# Altium PCB OSI_A15.PcbDoc (part 2 of 2)
Units mil, origin at the board's own origin, x right, y up, seen from the top; angles counter-clockwise.
Board outline 5750 x 3400 mil, 2 copper layers (Top Layer, Bottom Layer); 1 components, 123 nets, 352 pads, 0 vias.
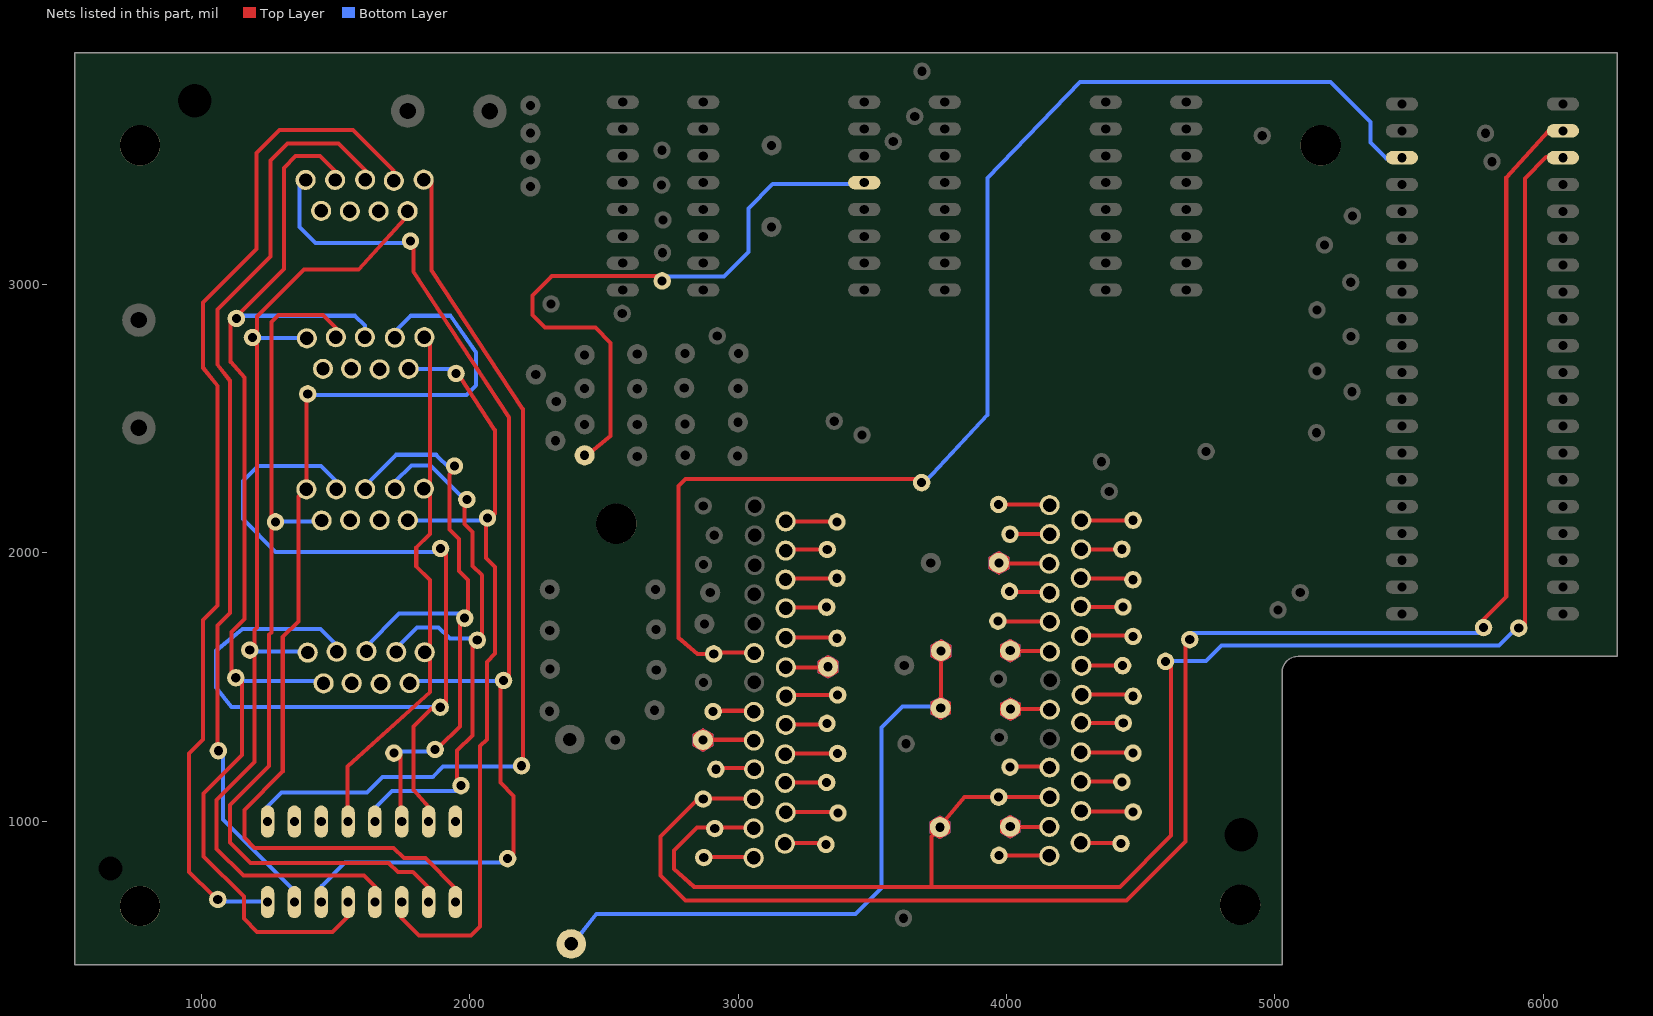
[diagram p2: the nets of this part, all layers, seen from the top]

## Nets (pads, with @x,y where several pads share a name; then routed paths per layer and width w, separated by ;. In a path a pad name is that pad's centre, name@x,y a point inside that pad or via, vN(x,y) a via of type N, cw(c..) or ccw(c..) an arc to the next point about the centre after c; other vN are vias at no path point) (continued)
$Net59: pad.1@2909,1623 pad.1@3060,1626 pad.1@3684,2261 pad.1@5473.5,3472 | length 4891.2
  Top Layer w15: pad.1@3060,1626 3039.5,1627.5 2919,1627.5 pad.1@2909,1623 2888.5,1622 2848.5,1622 2778,1683 2778,2249 2804,2275 3673,2275 pad.1@3684,2261
  Bottom Layer w15: pad.1@3684,2261 3698,2265 3929,2514 3929,3396 4274,3754 5207,3754 5356,3605 5356,3528 5414,3470 5465,3470 pad.1@5473.5,3472
$Net60: pad.1@2907,1408 pad.1@3059,1407 | length 152.5
  Top Layer w15: pad.1@2907,1408 2927.5,1411 3032,1411 pad.1@3059,1407
$Net61: pad.1@2869,1302 pad.1@3058.5,1300 | length 1091.5
  Top Layer w8: pad.1@2886.33,1331.98 2903.6,1322 2903.88,1303 2903.89,1302.52 pad.1@2903.9,1301.9 ; pad.1@2834,1301.9 pad.1@2869,1302 ; pad.1@2834,1301.9 2834,1322.1 pad.1@2851.4,1332.2 ; pad.1@2834,1301.9 2834,1301.83 2834.1,1281.6 pad.1@2851.5,1271.6 ; pad.1@2851.4,1332.2 pad.1@2869,1302 ; pad.1@2851.4,1332.2 2852,1332.53 2869,1342 2886.3,1332 pad.1@2869,1302 ; pad.1@2851.5,1271.6 2868.8,1261.6 2886.34,1271.61 pad.1@2886.5,1271.7 ; pad.1@2851.5,1271.6 pad.1@2869,1302 ; pad.1@2869,1302 pad.1@2903.9,1301.9 ; pad.1@2869,1302 pad.1@2886.5,1271.7 ; pad.1@2886.5,1271.7 2886.77,1271.86 2903.8,1281.9 2903.9,1301.83 pad.1@2903.9,1301.9
  Top Layer w15: pad.1@2869,1302 2893.5,1303 2903.88,1303 3028,1303 pad.1@3058.5,1300
  Bottom Layer w8: pad.1@2886.33,1331.98 2903.6,1322 2903.89,1302.52 pad.1@2903.9,1301.9 ; pad.1@2834,1301.9 pad.1@2869,1302 ; pad.1@2834,1301.9 2834,1301.83 2834.1,1281.6 pad.1@2851.5,1271.6 ; pad.1@2834,1301.9 2834,1322.1 pad.1@2851.4,1332.2 ; pad.1@2851.4,1332.2 pad.1@2869,1302 ; pad.1@2851.4,1332.2 2852,1332.53 2869,1342 2886.3,1332 pad.1@2869,1302 ; pad.1@2851.5,1271.6 2868.8,1261.6 2886.34,1271.61 pad.1@2886.5,1271.7 ; pad.1@2851.5,1271.6 pad.1@2869,1302 ; pad.1@2869,1302 pad.1@2903.9,1301.9 ; pad.1@2869,1302 pad.1@2886.5,1271.7 ; pad.1@2886.5,1271.7 2886.77,1271.86 2903.8,1281.9 2903.9,1301.83 pad.1@2903.9,1301.9
$Net62: pad.1@2917,1193 pad.1@3059.5,1193 | length 143.5
  Top Layer w15: pad.1@2917,1193 2942,1198 3032.5,1198 pad.1@3059.5,1193
$Net63: pad.1@2870,1082 pad.1@3057.5,1082 pad.1@4683,1676 pad.1@5778,1721 pad.1@6073.5,3572 | length 6532.8
  Top Layer w15: pad.1@3057.5,1082 3029,1084 2891.5,1084 pad.1@2870,1082 2852.5,1084.5 2710.5,942.5 2710.5,797.5 2804.5,703.5 4446.5,703.5 4667.5,924.5 4667.5,1661 pad.1@4683,1676 ; pad.1@5778,1721 5777.5,1736.5 5777.5,1751.5 5862.5,1836.5 5862.5,3397.5 6020.5,3571 pad.1@6073.5,3572
  Bottom Layer w15: pad.1@4683,1676 4680,1700 5770,1700 pad.1@5778,1721
$Net64: pad.1@2913,972 pad.1@3057.5,973 pad.1@3752,977 pad.1@3971,1089 pad.1@4161,1089 pad.1@4593,1595 pad.1@5909,1719 pad.1@6073.5,3472 | length 7848.9
  Top Layer w8: pad.1@3769.33,1006.98 3772.86,1004.94 3786.6,997 3786.89,977.52 pad.1@3786.9,976.9 ; pad.1@3717,976.9 3717,976.83 3717.1,956.6 3727.67,950.53 pad.1@3734.5,946.6 ; pad.1@3717,976.9 3749.65,976.99 pad.1@3752,977 ; pad.1@3717,976.9 3717,997.1 pad.1@3734.4,1007.2 ; pad.1@3734.4,1007.2 3751.03,978.66 pad.1@3752,977 ; pad.1@3734.4,1007.2 3735,1007.53 3752,1017 3769.3,1007 3757.33,986.25 pad.1@3752,977 ; pad.1@3734.5,946.6 3751.8,936.6 3769.34,946.61 pad.1@3769.5,946.7 ; pad.1@3734.5,946.6 pad.1@3752,977 ; pad.1@3752,977 pad.1@3786.9,976.9 ; pad.1@3752,977 pad.1@3769.5,946.7 ; pad.1@3769.5,946.7 3769.77,946.86 3786.8,956.9 3786.9,976.83 pad.1@3786.9,976.9
  Top Layer w15: pad.1@3057.5,973 3049,975.5 2847.5,975.5 2761.5,889.5 2761.5,822 2836,755 3721,755 ; pad.1@4161,1089 4135.5,1090 3843.5,1090 3772.86,1004.94 3757.33,986.25 3751.03,978.66 3750.61,978.15 3749.65,976.99 3727.67,950.53 3721,942.5 3721,755 ; pad.1@4593,1595 4613.5,1588 4613.5,946 4422.5,755 3721,755 ; pad.1@5909,1719 5931.5,1730.5 5931.5,3395 6011.5,3475 6040.5,3475 pad.1@6073.5,3472
  Bottom Layer w8: pad.1@3769.33,1006.98 3786.6,997 3786.89,977.52 pad.1@3786.9,976.9 ; pad.1@3717,976.9 pad.1@3752,977 ; pad.1@3717,976.9 3717,976.83 3717.1,956.6 pad.1@3734.5,946.6 ; pad.1@3717,976.9 3717,997.1 pad.1@3734.4,1007.2 ; pad.1@3734.4,1007.2 pad.1@3752,977 ; pad.1@3734.4,1007.2 3735,1007.53 3752,1017 3769.3,1007 pad.1@3752,977 ; pad.1@3734.5,946.6 3751.8,936.6 3769.34,946.61 pad.1@3769.5,946.7 ; pad.1@3734.5,946.6 pad.1@3752,977 ; pad.1@3752,977 pad.1@3786.9,976.9 ; pad.1@3752,977 pad.1@3769.5,946.7 ; pad.1@3769.5,946.7 3769.77,946.86 3786.8,956.9 3786.9,976.83 pad.1@3786.9,976.9
  Bottom Layer w15: pad.1@4593,1595 4603,1596 4743,1596 4801,1654 5836,1654 5890,1708 pad.1@5909,1719
$Net65: pad.1@2872,864 pad.1@3058,863 | length 186.2
  Top Layer w15: pad.1@2872,864 2889.5,865.5 3031,865.5 pad.1@3058,863
$Net66: pad.1@3174,915.5 pad.1@3327,913 | length 153.7
  Top Layer w15: pad.1@3174,915.5 3195,917.5 3310.5,917.5 pad.1@3327,913
$Net67: pad.1@3177,1032.5 pad.1@3372,1030 | length 195.5
  Top Layer w15: pad.1@3177,1032.5 3199.5,1034.5 3350,1034.5 pad.1@3372,1030
$Net68: pad.1@3175,1142 pad.1@3330,1144 | length 155.1
  Top Layer w15: pad.1@3175,1142 3198,1144.5 3314.5,1144.5 pad.1@3330,1144
$Net69: pad.1@3175,1249 pad.1@3371,1252 | length 196.3
  Top Layer w15: pad.1@3175,1249 3193.5,1252.5 3352.5,1252.5 pad.1@3371,1252
$Net70: pad.1@3177.5,1358.5 pad.1@3331,1364 | length 154
  Top Layer w15: pad.1@3177.5,1358.5 3199.5,1360 3315,1360 pad.1@3331,1364
$Net71: pad.1@3178.5,1464.5 pad.1@3371,1470 | length 193.7
  Top Layer w15: pad.1@3178.5,1464.5 3190.5,1470 pad.1@3371,1470
$Net72: pad.1@3178,1573 pad.1@3335,1575 | length 1059
  Top Layer w8: pad.1@3352.33,1604.98 3369.6,1595 3369.89,1575.52 pad.1@3369.9,1574.9 ; pad.1@3300,1574.9 pad.1@3335,1575 ; pad.1@3300,1574.9 3300,1574.83 3300.01,1573 3300.1,1554.6 pad.1@3317.5,1544.6 ; pad.1@3300,1574.9 3300,1595.1 pad.1@3317.4,1605.2 ; pad.1@3317.4,1605.2 pad.1@3335,1575 ; pad.1@3317.4,1605.2 3318,1605.53 3335,1615 3352.3,1605 pad.1@3335,1575 ; pad.1@3317.5,1544.6 3334.8,1534.6 3352.34,1544.61 pad.1@3352.5,1544.7 ; pad.1@3317.5,1544.6 pad.1@3335,1575 ; pad.1@3335,1575 pad.1@3369.9,1574.9 ; pad.1@3335,1575 pad.1@3352.5,1544.7 ; pad.1@3352.5,1544.7 3352.77,1544.86 3369.8,1554.9 3369.9,1574.83 pad.1@3369.9,1574.9
  Top Layer w15: pad.1@3178,1573 3300.01,1573 3322.5,1573 pad.1@3335,1575
  Bottom Layer w8: pad.1@3352.33,1604.98 3369.6,1595 3369.89,1575.52 pad.1@3369.9,1574.9 ; pad.1@3300,1574.9 pad.1@3335,1575 ; pad.1@3300,1574.9 3300,1574.83 3300.1,1554.6 pad.1@3317.5,1544.6 ; pad.1@3300,1574.9 3300,1595.1 pad.1@3317.4,1605.2 ; pad.1@3317.4,1605.2 pad.1@3335,1575 ; pad.1@3317.4,1605.2 3318,1605.53 3335,1615 3352.3,1605 pad.1@3335,1575 ; pad.1@3317.5,1544.6 3334.8,1534.6 3352.34,1544.61 pad.1@3352.5,1544.7 ; pad.1@3317.5,1544.6 pad.1@3335,1575 ; pad.1@3335,1575 pad.1@3369.9,1574.9 ; pad.1@3335,1575 pad.1@3352.5,1544.7 ; pad.1@3352.5,1544.7 3352.77,1544.86 3369.8,1554.9 3369.9,1574.83 pad.1@3369.9,1574.9
$Net73: pad.1@3177,1682.5 pad.1@3369,1681 | length 192.3
  Top Layer w15: pad.1@3177,1682.5 3187.5,1684 3349,1684 pad.1@3369,1681
$Net74: pad.1@3177,1793 pad.1@3330,1797 | length 153.2
  Top Layer w15: pad.1@3177,1793 3203,1796 3313.5,1796 pad.1@3330,1797
$Net75: pad.1@3176.5,1900 pad.1@3368,1905 | length 191.8
  Top Layer w15: pad.1@3176.5,1900 3203.5,1903 3349,1903 pad.1@3368,1905
$Net76: pad.1@3177,2008 pad.1@3332,2012 | length 155.3
  Top Layer w15: pad.1@3177,2008 3200,2012 pad.1@3332,2012
$Net77: pad.1@3177,2116.5 pad.1@3368,2115 | length 191.1
  Top Layer w15: pad.1@3177,2116.5 3204,2117 3346.5,2117 pad.1@3368,2115
$Net79: pad.1@3972,1962 pad.1@4160,1959 | length 1089.9
  Top Layer w8: pad.1@3989.33,1991.98 4006.6,1982 4006.89,1962.52 pad.1@4006.9,1961.9 ; pad.1@3937,1961.9 pad.1@3972,1962 ; pad.1@3937,1961.9 3937,1982.1 pad.1@3954.4,1992.2 ; pad.1@3937,1961.9 3937,1961.83 3937.1,1941.6 pad.1@3954.5,1931.6 ; pad.1@3954.4,1992.2 pad.1@3972,1962 ; pad.1@3954.4,1992.2 3955,1992.53 3972,2002 3989.3,1992 pad.1@3972,1962 ; pad.1@3954.5,1931.6 3971.8,1921.6 3989.34,1931.61 pad.1@3989.5,1931.7 ; pad.1@3954.5,1931.6 pad.1@3972,1962 ; pad.1@3972,1962 pad.1@4006.9,1961.9 ; pad.1@3972,1962 pad.1@3989.5,1931.7 ; pad.1@3989.5,1931.7 3989.77,1931.86 4006.8,1941.9 4006.89,1960.5 4006.9,1961.83 pad.1@4006.9,1961.9
  Top Layer w15: pad.1@3972,1962 3992,1960.5 4006.89,1960.5 4135,1960.5 pad.1@4160,1959
  Bottom Layer w8: pad.1@3989.33,1991.98 4006.6,1982 4006.89,1962.52 pad.1@4006.9,1961.9 ; pad.1@3937,1961.9 pad.1@3972,1962 ; pad.1@3937,1961.9 3937,1961.83 3937.1,1941.6 pad.1@3954.5,1931.6 ; pad.1@3937,1961.9 3937,1982.1 pad.1@3954.4,1992.2 ; pad.1@3954.4,1992.2 pad.1@3972,1962 ; pad.1@3954.4,1992.2 3955,1992.53 3972,2002 3989.3,1992 pad.1@3972,1962 ; pad.1@3954.5,1931.6 3971.8,1921.6 3989.34,1931.61 pad.1@3989.5,1931.7 ; pad.1@3954.5,1931.6 pad.1@3972,1962 ; pad.1@3972,1962 pad.1@4006.9,1961.9 ; pad.1@3972,1962 pad.1@3989.5,1931.7 ; pad.1@3989.5,1931.7 3989.77,1931.86 4006.8,1941.9 4006.9,1961.83 pad.1@4006.9,1961.9
$Net80: pad.1@4011,1856 pad.1@4160.5,1850 | length 149.8
  Top Layer w15: pad.1@4011,1856 4034,1853 4130.5,1853 pad.1@4160.5,1850
$Net81: pad.1@3968,1745 pad.1@4161.5,1742.5 | length 193.6
  Top Layer w15: pad.1@3968,1745 3983.5,1744 4134.5,1744 pad.1@4161.5,1742.5
$Net82: pad.1@4014,1635 pad.1@4162,1631 | length 1050
  Top Layer w8: pad.1@4031.33,1664.98 4048.6,1655 4048.89,1635.52 pad.1@4048.9,1634.9 ; pad.1@3979,1634.9 pad.1@4014,1635 ; pad.1@3979,1634.9 3979,1655.1 pad.1@3996.4,1665.2 ; pad.1@3979,1634.9 3979,1634.83 3979.1,1614.6 pad.1@3996.5,1604.6 ; pad.1@3996.4,1665.2 pad.1@4014,1635 ; pad.1@3996.4,1665.2 3997,1665.53 4014,1675 4031.3,1665 pad.1@4014,1635 ; pad.1@3996.5,1604.6 4013.8,1594.6 4031.34,1604.61 pad.1@4031.5,1604.7 ; pad.1@3996.5,1604.6 pad.1@4014,1635 ; pad.1@4014,1635 pad.1@4048.9,1634.9 ; pad.1@4014,1635 pad.1@4031.5,1604.7 ; pad.1@4031.5,1604.7 4031.77,1604.86 4048.8,1614.9 4048.89,1633.5 4048.9,1634.83 pad.1@4048.9,1634.9
  Top Layer w15: pad.1@4014,1635 4033.5,1633.5 4048.89,1633.5 4134.5,1633.5 pad.1@4162,1631
  Bottom Layer w8: pad.1@4031.33,1664.98 4048.6,1655 4048.89,1635.52 pad.1@4048.9,1634.9 ; pad.1@3979,1634.9 pad.1@4014,1635 ; pad.1@3979,1634.9 3979,1634.83 3979.1,1614.6 pad.1@3996.5,1604.6 ; pad.1@3979,1634.9 3979,1655.1 pad.1@3996.4,1665.2 ; pad.1@3996.4,1665.2 pad.1@4014,1635 ; pad.1@3996.4,1665.2 3997,1665.53 4014,1675 4031.3,1665 pad.1@4014,1635 ; pad.1@3996.5,1604.6 4013.8,1594.6 4031.34,1604.61 pad.1@4031.5,1604.7 ; pad.1@3996.5,1604.6 pad.1@4014,1635 ; pad.1@4014,1635 pad.1@4048.9,1634.9 ; pad.1@4014,1635 pad.1@4031.5,1604.7 ; pad.1@4031.5,1604.7 4031.77,1604.86 4048.8,1614.9 4048.9,1634.83 pad.1@4048.9,1634.9
$Net83: pad.1@4015,1417 pad.1@4161.5,1415 | length 1048.4
  Top Layer w8: pad.1@4032.33,1446.98 4049.6,1437 4049.89,1417.52 4049.9,1417 pad.1@4049.9,1416.9 ; pad.1@3980,1416.9 pad.1@4015,1417 ; pad.1@3980,1416.9 3980,1437.1 pad.1@3997.4,1447.2 ; pad.1@3980,1416.9 3980,1416.83 3980.1,1396.6 pad.1@3997.5,1386.6 ; pad.1@3997.4,1447.2 pad.1@4015,1417 ; pad.1@3997.4,1447.2 3998,1447.53 4015,1457 4032.3,1447 pad.1@4015,1417 ; pad.1@3997.5,1386.6 4014.8,1376.6 4032.34,1386.61 pad.1@4032.5,1386.7 ; pad.1@3997.5,1386.6 pad.1@4015,1417 ; pad.1@4015,1417 pad.1@4049.9,1416.9 ; pad.1@4015,1417 pad.1@4032.5,1386.7 ; pad.1@4032.5,1386.7 4032.77,1386.86 4049.8,1396.9 4049.9,1416.83 pad.1@4049.9,1416.9
  Top Layer w15: pad.1@4015,1417 4049.9,1417 4142.5,1417 pad.1@4161.5,1415
  Bottom Layer w8: pad.1@4032.33,1446.98 4049.6,1437 4049.89,1417.52 pad.1@4049.9,1416.9 ; pad.1@3980,1416.9 pad.1@4015,1417 ; pad.1@3980,1416.9 3980,1416.83 3980.1,1396.6 pad.1@3997.5,1386.6 ; pad.1@3980,1416.9 3980,1437.1 pad.1@3997.4,1447.2 ; pad.1@3997.4,1447.2 pad.1@4015,1417 ; pad.1@3997.4,1447.2 3998,1447.53 4015,1457 4032.3,1447 pad.1@4015,1417 ; pad.1@3997.5,1386.6 4014.8,1376.6 4032.34,1386.61 pad.1@4032.5,1386.7 ; pad.1@3997.5,1386.6 pad.1@4015,1417 ; pad.1@4015,1417 pad.1@4049.9,1416.9 ; pad.1@4015,1417 pad.1@4032.5,1386.7 ; pad.1@4032.5,1386.7 4032.77,1386.86 4049.8,1396.9 4049.9,1416.83 pad.1@4049.9,1416.9
$Net84: pad.1@4013,1201 pad.1@4160.5,1199.5 | length 148.1
  Top Layer w15: pad.1@4013,1201 4031,1203 4147,1203 pad.1@4160.5,1199.5
$Net85: pad.1@4014,979 pad.1@4160,978 | length 1047.8
  Top Layer w8: pad.1@4031.33,1008.98 4048.6,999 4048.89,979.52 pad.1@4048.9,978.9 ; pad.1@3979,978.9 pad.1@4014,979 ; pad.1@3979,978.9 3979,999.1 pad.1@3996.4,1009.2 ; pad.1@3979,978.9 3979,978.83 3979.1,958.6 pad.1@3996.5,948.6 ; pad.1@3996.4,1009.2 pad.1@4014,979 ; pad.1@3996.4,1009.2 3997,1009.53 4014,1019 4031.3,1009 pad.1@4014,979 ; pad.1@3996.5,948.6 4013.8,938.6 4031.34,948.61 pad.1@4031.5,948.7 ; pad.1@3996.5,948.6 pad.1@4014,979 ; pad.1@4014,979 pad.1@4048.9,978.9 ; pad.1@4014,979 pad.1@4031.5,948.7 ; pad.1@4031.5,948.7 4031.77,948.86 4048.8,958.9 4048.9,978 4048.9,978.83 pad.1@4048.9,978.9
  Top Layer w15: pad.1@4014,979 4032,978 4048.9,978 pad.1@4160,978
  Bottom Layer w8: pad.1@4031.33,1008.98 4048.6,999 4048.89,979.52 pad.1@4048.9,978.9 ; pad.1@3979,978.9 pad.1@4014,979 ; pad.1@3979,978.9 3979,978.83 3979.1,958.6 pad.1@3996.5,948.6 ; pad.1@3979,978.9 3979,999.1 pad.1@3996.4,1009.2 ; pad.1@3996.4,1009.2 pad.1@4014,979 ; pad.1@3996.4,1009.2 3997,1009.53 4014,1019 4031.3,1009 pad.1@4014,979 ; pad.1@3996.5,948.6 4013.8,938.6 4031.34,948.61 pad.1@4031.5,948.7 ; pad.1@3996.5,948.6 pad.1@4014,979 ; pad.1@4014,979 pad.1@4048.9,978.9 ; pad.1@4014,979 pad.1@4031.5,948.7 ; pad.1@4031.5,948.7 4031.77,948.86 4048.8,958.9 4048.9,978.83 pad.1@4048.9,978.9
$Net86: pad.1@3972,872 pad.1@4160,870.5 | length 188
  Top Layer w15: pad.1@3972,872 3995.5,871.5 4138.5,871.5 pad.1@4160,870.5
$Net87: pad.1@2378,542 pad.1@3755,1421 pad.1@3756,1634 | length 4117
  Top Layer w8: pad.1@3772.33,1450.98 3789.6,1441 3789.89,1421.52 pad.1@3789.9,1420.9 ; pad.1@3773.33,1663.98 3790.6,1654 3790.89,1634.52 pad.1@3790.9,1633.9 ; pad.1@3720,1420.9 pad.1@3755,1421 ; pad.1@3720,1420.9 3720,1420.83 3720.1,1400.6 pad.1@3737.5,1390.6 ; pad.1@3720,1420.9 3720,1441.1 pad.1@3737.4,1451.2 ; pad.1@3721,1633.9 pad.1@3756,1634 ; pad.1@3721,1633.9 3721,1654.1 pad.1@3738.4,1664.2 ; pad.1@3721,1633.9 3721,1633.83 3721.1,1613.6 pad.1@3738.5,1603.6 ; pad.1@3737.4,1451.2 pad.1@3755,1421 ; pad.1@3737.4,1451.2 3738,1451.53 3755,1461 3755.5,1460.71 3772.3,1451 pad.1@3755,1421 ; pad.1@3737.5,1390.6 3754.8,1380.6 3772.34,1390.61 pad.1@3772.5,1390.7 ; pad.1@3737.5,1390.6 pad.1@3755,1421 ; pad.1@3738.4,1664.2 pad.1@3756,1634 ; pad.1@3738.4,1664.2 3739,1664.53 3756,1674 3773.3,1664 pad.1@3756,1634 ; pad.1@3738.5,1603.6 pad.1@3756,1634 ; pad.1@3738.5,1603.6 3755.5,1593.77 3755.8,1593.6 3773.34,1603.61 pad.1@3773.5,1603.7 ; pad.1@3755,1421 pad.1@3789.9,1420.9 ; pad.1@3755,1421 pad.1@3772.5,1390.7 ; pad.1@3756,1634 pad.1@3790.9,1633.9 ; pad.1@3756,1634 pad.1@3773.5,1603.7 ; pad.1@3772.5,1390.7 3772.77,1390.86 3789.8,1400.9 3789.9,1420.83 pad.1@3789.9,1420.9 ; pad.1@3773.5,1603.7 3773.77,1603.86 3790.8,1613.9 3790.9,1633.83 pad.1@3790.9,1633.9
  Top Layer w15: pad.1@3755,1421 3755.5,1425.5 3755.5,1460.71 3755.5,1593.77 3755.5,1619.5 pad.1@3756,1634
  Bottom Layer w8: pad.1@3772.33,1450.98 3789.6,1441 3789.89,1421.52 pad.1@3789.9,1420.9 ; pad.1@3773.33,1663.98 3790.6,1654 3790.89,1634.52 pad.1@3790.9,1633.9 ; pad.1@3720,1420.9 pad.1@3755,1421 ; pad.1@3720,1420.9 3720,1420.83 3720.1,1400.6 pad.1@3737.5,1390.6 ; pad.1@3720,1420.9 3720,1426 3720,1441.1 pad.1@3737.4,1451.2 ; pad.1@3721,1633.9 pad.1@3756,1634 ; pad.1@3721,1633.9 3721,1654.1 pad.1@3738.4,1664.2 ; pad.1@3721,1633.9 3721,1633.83 3721.1,1613.6 pad.1@3738.5,1603.6 ; pad.1@3737.4,1451.2 pad.1@3755,1421 ; pad.1@3737.4,1451.2 3738,1451.53 3755,1461 3772.3,1451 pad.1@3755,1421 ; pad.1@3737.5,1390.6 3754.8,1380.6 3772.34,1390.61 pad.1@3772.5,1390.7 ; pad.1@3737.5,1390.6 pad.1@3755,1421 ; pad.1@3738.4,1664.2 pad.1@3756,1634 ; pad.1@3738.4,1664.2 3739,1664.53 3756,1674 3773.3,1664 pad.1@3756,1634 ; pad.1@3738.5,1603.6 3755.8,1593.6 3773.34,1603.61 pad.1@3773.5,1603.7 ; pad.1@3738.5,1603.6 pad.1@3756,1634 ; pad.1@3755,1421 pad.1@3789.9,1420.9 ; pad.1@3755,1421 pad.1@3772.5,1390.7 ; pad.1@3756,1634 pad.1@3790.9,1633.9 ; pad.1@3756,1634 pad.1@3773.5,1603.7 ; pad.1@3772.5,1390.7 3772.77,1390.86 3789.8,1400.9 3789.9,1420.83 pad.1@3789.9,1420.9 ; pad.1@3773.5,1603.7 3773.77,1603.86 3790.8,1613.9 3790.9,1633.83 pad.1@3790.9,1633.9
  Bottom Layer w15: pad.1@2378,542 2391,551 2472,654 3438,654 3535,751 3535,1348 3613,1426 3720,1426 3744,1426 pad.1@3755,1421
$Net88: pad.1@4279.5,1578.5 pad.1@4433,1579 | length 153.5
  Top Layer w15: pad.1@4279.5,1578.5 4304,1579 pad.1@4433,1579
$Net89: pad.1@4278,1689 pad.1@4472,1688 | length 194.7
  Top Layer w15: pad.1@4278,1689 4297,1692 4453.5,1692 pad.1@4472,1688
$Net90: pad.1@4277.5,1799.5 pad.1@4434,1798 | length 156.6
  Top Layer w15: pad.1@4277.5,1799.5 4297.5,1798 pad.1@4434,1798
$Net91: pad.1@4277,1905.5 pad.1@4471,1899 | length 194.6
  Top Layer w15: pad.1@4277,1905.5 4295.5,1903 4454.5,1903 pad.1@4471,1899
$Net92: pad.1@4278,2012.5 pad.1@4430,2013 | length 152.1
  Top Layer w15: pad.1@4278,2012.5 4297.5,2011.5 4412,2011.5 pad.1@4430,2013
$Net93: pad.1@4279,2120.5 pad.1@4472,2121 | length 193.1
  Top Layer w15: pad.1@4279,2120.5 4292.5,2119.5 4451.5,2119.5 pad.1@4472,2121
$Net94: pad.1@4280,1470.5 pad.1@4472,1465 | length 193
  Top Layer w15: pad.1@4280,1470.5 4303.5,1471.5 4450,1471.5 pad.1@4472,1465
$Net95: pad.1@4278.5,1366.5 pad.1@4435,1365 | length 156.5
  Top Layer w15: pad.1@4278.5,1366.5 4297.5,1366 4413,1366 pad.1@4435,1365
$Net96: pad.1@4277.5,1256 pad.1@4471,1253 | length 193.6
  Top Layer w15: pad.1@4277.5,1256 4298,1255 4452.5,1255 pad.1@4471,1253
$Net97: pad.1@4277.5,1147 pad.1@4430,1145 | length 152.6
  Top Layer w15: pad.1@4277.5,1147 4410,1147 pad.1@4430,1145
$Net98: pad.1@4278,1037.5 pad.1@4472,1034 | length 194.2
  Top Layer w15: pad.1@4278,1037.5 4292.5,1035 4449.5,1035 pad.1@4472,1034
$Net99: pad.1@4276.5,919.5 pad.1@4427,916 | length 150.7
  Top Layer w15: pad.1@4276.5,919.5 4293.5,918.5 4407.5,918.5 pad.1@4427,916
$Net100: pad.1@1388,3389 pad.1@1446.5,698 pad.1@1776,1514 pad.1@1779,3161 pad.1@2126,1524 pad.1@2141,860 | length 4250.9
  Top Layer w15: pad.1@1779,3161 1789.5,3143.5 1789.5,3048 2147,2503 2147,1538.5 pad.1@2114,1505.5 ; pad.1@2126,1524 pad.1@2114,1505.5 ; pad.1@2141,860 2151.5,867 2163,878.5 2163,1094 2114,1143 pad.1@2114,1505.5
  Bottom Layer w15: pad.1@1388,3389 1366,3372 1366,3214 1425,3155 1766,3155 pad.1@1779,3161 ; pad.1@1446.5,698 1447,730 1447,757 1535,845 2132,845 pad.1@2141,860 ; pad.1@1776,1514 1803,1522 2105,1522 pad.1@2126,1524
$Net101: pad.1@1946.5,998
$Net102: pad.1@1502,2236 pad.1@1504,1631 pad.1@1846.5,998 pad.1@1890,1424 pad.1@1891,2016 | length 4022
  Top Layer w15: pad.1@1846.5,998 1847.5,1050 1790,1116.5 1790,1352 1856.5,1418.5 pad.1@1890.5,1418.5 ; pad.1@1890,1424 pad.1@1890.5,1418.5 ; pad.1@1891,2016 1911,2008 1911,1439 pad.1@1890.5,1418.5
  Bottom Layer w15: pad.1@1502,2236 1499,2246 1499,2269 1445,2323 1210,2323 1154,2267 1154,2125 1276,2003 1878,2003 pad.1@1891,2016 ; pad.1@1504,1631 1498,1661 1443,1716 1153,1716 1054,1635 1054,1498 1112,1425 1873,1425 pad.1@1890,1424
$Net103: pad.1@1610,2237 pad.1@1615,1633 pad.1@1717,1253 pad.1@1746.5,998 pad.1@1871,1267 pad.1@1943,2323 pad.1@1981,1756 | length 2460.6
  Top Layer w15: pad.1@1717,1253 1742.5,1244.5 1742.5,1038.5 pad.1@1746.5,998 ; pad.1@1871,1267 1888,1278 1963,1353 1963,1740.5 pad.1@1994,1771.5 ; pad.1@1943,2323 1948.5,2316 1924,2291.5 1924,2086.5 1959.5,2051 1959.5,1932 1994,1897.5 pad.1@1994,1771.5 ; pad.1@1981,1756 pad.1@1994,1771.5
  Bottom Layer w15: pad.1@1610,2237 1618,2258 1725,2365 1875,2365 1927,2313 pad.1@1943,2323 ; pad.1@1615,1633 1615,1651 1737,1773 1969,1773 pad.1@1981,1756 ; pad.1@1717,1253 1730,1260 1852,1260 pad.1@1871,1267
$Net104: pad.1@1646.5,998 pad.1@1721,2237 pad.1@1726,1630 pad.1@1967,1132 pad.1@1989,2198 pad.1@2028,1674 | length 2308.3
  Top Layer w15: pad.1@1967,1132 1952.5,1146 1952.5,1262.5 2009.5,1319.5 pad.1@2009.5,1663 ; pad.1@1989,2198 1980.5,2184.5 1980.5,2107 2010,2077.5 2010,1951 2045,1916 2045,1698.5 pad.1@2009.5,1663 ; pad.1@2028,1674 pad.1@2009.5,1663
  Bottom Layer w15: pad.1@1646.5,998 1649,1015 1649,1051 1710,1112 1960,1112 pad.1@1967,1132 ; pad.1@1721,2237 1722,2265 1782,2325 1853,2325 1974,2204 pad.1@1989,2198 ; pad.1@1726,1630 1731,1649 1804,1722 1884,1722 1926,1680 2012,1680 pad.1@2028,1674
$Net105: pad.1@1546.5,998 pad.1@1829,2239 pad.1@1831,2803 pad.1@1832,1629 | length 1994.6
  Top Layer w15: pad.1@1546.5,998 1545,1030.5 1545,1204 1852.5,1481.5 1852.5,1897.5 1800.5,1949.5 1800.5,2019.5 1851.5,2070.5 1851.5,2787.5 pad.1@1831,2803
$Net106: pad.1@1446.5,998
$Net107: pad.1@1346.5,998
$Net108: pad.1@1246.5,998 pad.1@1828,3390 pad.1@2193,1206 | length 3378.6
  Top Layer w15: pad.1@1828,3390 1857.5,3386.5 1857.5,3051 2198,2535 2198,1222 pad.1@2193,1206
  Bottom Layer w15: pad.1@1246.5,998 1245,1017 1245,1053 1299,1107 1617,1107 1675,1165 1862,1165 1900,1203 2174,1203 pad.1@2193,1206
$Net109: pad.1@1061,708 pad.1@1246.5,698 pad.1@1717,3386 | length 3805.6
  Top Layer w15: pad.1@1061,708 1043,722 954,811 954,1251.5 1006.5,1304 1006.5,1749.5 1059.5,1802.5 1059.5,2622 1006.5,2688.5 1006.5,2932 1205.5,3131 1205.5,3489 1291.5,3575 1565.5,3575 1716.5,3424 1716.5,3399.5 pad.1@1717,3386
  Bottom Layer w15: pad.1@1061,708 1081,701 1236,701 pad.1@1246.5,698
$Net110: pad.1@1063,1262 pad.1@1346.5,698 pad.1@1610,3390 | length 3464.6
  Top Layer w15: pad.1@1063,1262 1059,1284 1059,1728.5 1106,1775.5 1106,2641.5 1059.5,2701 1059.5,2906 1256.5,3103 1256.5,3461 1321,3525.5 1511,3525.5 1613.5,3423 pad.1@1610,3390
  Bottom Layer w15: pad.1@1063,1262 1057,1261 1080,1238 1080,1006 1346,740 pad.1@1346.5,698
$Net111: pad.1@1128,1534 pad.1@1130,2873 pad.1@1455,1513 pad.1@1498,3389 pad.1@1546.5,698 pad.1@1609,2803 | length 4749.3
  Top Layer w15: pad.1@1128,1534 pad.1@1112,1536.5 ; pad.1@1130,2873 pad.1@1109,2858 ; pad.1@1498,3389 1497,3390.5 1497,3422.5 1442,3477.5 1351,3477.5 1307.5,3434 1307.5,3056.5 pad.1@1109,2858 ; pad.1@1546.5,698 1551,649 1489,587 1207.5,587 1158.5,636 1158.5,718 1008.5,868 1008.5,1103.5 1151,1246 1151,1536.5 pad.1@1112,1536.5 ; pad.1@1109,2858 1109,2711.5 1160.5,2653 1160.5,1753 1112,1704.5 pad.1@1112,1536.5
  Bottom Layer w15: pad.1@1128,1534 1143,1522 1434,1522 pad.1@1455,1513 ; pad.1@1130,2873 1137,2883 1572,2883 1609,2846 pad.1@1609,2803
$Net112: pad.1@1180,1637 pad.1@1190,2802 pad.1@1393,2799 pad.1@1396,1628 pad.1@1646.5,698 pad.1@1768,3273 | length 3910.5
  Top Layer w15: pad.1@1646.5,698 1648,734 1648,753.5 1605,796.5 1156,796.5 1056,896.5 1056,1078 1198,1220 1198,1712.5 1207,1721.5 1207,2879.5 1382,3054.5 1586,3054.5 1758.5,3245 pad.1@1768,3273
  Bottom Layer w15: pad.1@1180,1637 1198,1632 1375,1632 pad.1@1396,1628 ; pad.1@1190,2802 1213,2800 1368,2800 pad.1@1393,2799
$Net113: pad.1@1746.5,698 pad.1@1769,2121 pad.1@1772,2685 pad.1@1949,2668 pad.1@2066,2129 | length 3058.7
  Top Layer w15: pad.1@1746.5,698 1744,676.5 1744,640 1811,573 2004.5,573 2038,606.5 2038,1279 2063.5,1304.5 2063.5,1593 2094.5,1624 2094.5,1946 2060.5,1980 pad.1@2060.5,2113 ; pad.1@1949,2668 1965,2654.5 2093.5,2456.5 2093.5,2146 pad.1@2060.5,2113 ; pad.1@2066,2129 pad.1@2060.5,2113
  Bottom Layer w15: pad.1@1769,2121 1786,2120 2058,2120 pad.1@2066,2129 ; pad.1@1772,2685 1786,2684 1944,2684 pad.1@1949,2668
$Net114: pad.1@1276,2115 pad.1@1448,2120 pad.1@1501,2803 pad.1@1846.5,698 | length 3346.7
  Top Layer w15: pad.1@1501,2803 1501,2838 1453,2886 1286.5,2886 1260.5,2860 1260.5,1702.5 1252.5,1694.5 1252.5,1206 1107,1060.5 1107,919.5 1182,844.5 1698,844.5 1732,810.5 1787.5,810.5 1849.5,748.5 pad.1@1846.5,698
  Bottom Layer w15: pad.1@1276,2115 1279,2116 1427,2116 pad.1@1448,2120
$Net115: pad.1@1391,2236 pad.1@1396,2592 pad.1@1721,2801 pad.1@1946.5,698 | length 3858.9
  Top Layer w15: pad.1@1391,2236 pad.1@1392,2239.5 ; pad.1@1396,2592 1392,2576.5 pad.1@1392,2239.5 ; pad.1@1946.5,698 1949,747 1834.5,861.5 1754,861.5 1715.5,900 1198,900 1160,938 1160,1041 1303,1184 1303,1685 1362,1744 1362,2209.5 pad.1@1392,2239.5
  Bottom Layer w15: pad.1@1396,2592 1411,2587 1987,2587 2024,2624 2024,2746 1928,2883 1780,2883 1722,2825 pad.1@1721,2801
$Net117: pad.1@2428,2363 pad.1@2717,3013 pad.1@3470,3379 | length 2399.5
  Top Layer w15: pad.1@2428,2363 2441,2367 2525,2435.5 2525,2782 2468.5,2838.5 2281,2838.5 2233.5,2886 2233.5,2958.5 2305.5,3030.5 2707,3030.5 pad.1@2717,3013
  Bottom Layer w15: pad.1@2717,3013 2727,3030 2947,3030 3038,3121 3038,3283 3129,3374 3435,3374 pad.1@3470,3379
$Net118: pad.1@4013,2069 pad.1@4162,2069.5 | length 149
  Top Layer w15: pad.1@4013,2069 4032,2070 4137,2070 pad.1@4162,2069.5
$Net119: pad.1@3971,2180 pad.1@4161,2177.5 | length 190.1
  Top Layer w15: pad.1@3971,2180 4134,2180 pad.1@4161,2177.5
$Net120: pad.1@1668,1511
$Net121: pad.1@1560,1514
$Net122: pad.1@1664,2121
$Net123: pad.1@1554,2121
$Net124: pad.1@1453,2685
$Net125: pad.1@1558,2686
$Net126: pad.1@1664,2683
$Net127: pad.1@1446,3274
$Net128: pad.1@1553,3272
$Net129: pad.1@1660,3272
$Net131: pad.1@660.5,823.5
$Net132: pad.1@975.5,3683.5
$Net133: pad.1@4875.5,948.5
$Net134: pad.1@771,683
$Net135: pad.1@771,3518
$Net136: pad.1@2546,2108
$Net137: pad.1@4871,688
$Net138: pad.1@5171,3518

## Other copper
Top Layer:
  text "J5" at 2014,5881 h90
  text "_" at 5375,3736 h150 r270
  text "J1" at 6114,3724 h90
  text "J4" at 2658,3693 h90
  text "J2" at 4466,3683 h90
  text "_" at 2036,3564 h150
  text "J3" at 3242,3539 h90
  text "+" at 1794,3504 h150 r90
  text "J5" at 2061,3297 h90
  text "J6" at 2061,3008 h90
  text "+" at 724,2956 h150
  text "+" at 2380,2660 h150 r90
  text "_" at 718,2374 h150
  text "J9" at 3093,2331 h90
  text "J8" at 3976,2296 h90
  text "J7" at 2256,2155 h90
  text "J10" at 2358,1613 h90
  text "_" at 2062,967 h150 r90
  text "J1" at 2123,700 h90
  text "1" at 2199,700 h90
Bottom Layer:
  text "_" at 4809,3722 h150 r270
  text "_" at 3888,3714 h150 r270
  text "_" at 2114,3519 h150 r180
  text "+" at 1794,3504 h150 r90
  text "_" at 1805,3449 h150 r90
  text "+" at 724,2956 h150
  text "_" at 1814,2909 h150 r90
  text "+" at 2380,2660 h150 r90
  text "_" at 1827,2399 h150 r90
  text "_" at 718,2374 h150
  text "_" at 1804,1794 h150 r90
  text "REV    A" at 599.9,1571.9 h70 r270
  text "A15" at 705,1371 h180 r270
  text "1979" at 549,1118 h180 r270
  text "C" at 592,935 h70 r270
  text "O" at 558,901 h180 r270
  text "OSI" at 703,901 h180 r270
  text "_" at 4180,805 h150 r270
  text "_" at 3074,802 h150 r270

## Silkscreen, mask and mechanical layers (free items; w line width, h text height)
Mechanical 1:
  the board outline again, w10
Drill Drawing:
  circle w10: c635.62,4348.83 r33.33
  lines w10: 602.29,4165.5 668.96,4165.5 668.96,4232.17 602.29,4232.17 602.29,4165.5 ; 602.29,4482.17 618.96,4482.17 635.62,4465.5 652.29,4482.17 668.96,4482.17 652.29,4498.83 668.96,4515.5 652.29,4515.5 635.62,4532.17 618.96,4515.5 602.29,4515.5 618.96,4498.83 602.29,4482.17 ; 602.29,4682.17 668.96,4682.17 635.62,4615.5 602.29,4682.17 ; 602.29,4765.5 635.62,4782.17 668.96,4765.5 652.29,4798.83 668.96,4832.17 635.62,4815.5 602.29,4832.17 618.96,4798.83 602.29,4765.5 ; 602.29,4932.17 618.96,4932.17 618.96,4915.5 652.29,4915.5 652.29,4932.17 668.96,4932.17 668.96,4965.5 652.29,4965.5 652.29,4982.17 618.96,4982.17 618.96,4965.5 602.29,4965.5 602.29,4932.17
  lines w15: 542.5,4120.5 11123.57,4120.5 ; 542.5,5020.5 11123.57,5020.5 ; 1093.38,3970.5 1093.38,5170.5 ; 1693.22,3970.5 1693.22,5170.5 ; 2832.88,3970.5 2832.88,5170.5 ; 3338.76,3970.5 3338.76,5170.5 ; 4072.56,3970.5 4072.56,5170.5 ; 5572.11,3970.5 5572.11,5170.5 ; 6161.96,3970.5 6161.96,5170.5 ; 6907.76,3970.5 6907.76,5170.5 ; 7557.59,3970.5 7557.59,5170.5 ; 8411.35,3970.5 8411.35,5170.5 ; 9744.96,3970.5 9744.96,5170.5 ; 542.5,3970.5 11123.57,3970.5 11123.57,5170.5 542.5,5170.5 542.5,3970.5
  text "Symbol" at 632.5,5065.5 h72
  text "Count" at 1138.38,5065.5 h72
  text "Hole Size" at 1738.22,5065.5 h72
  text "Plated" at 2877.88,5065.5 h72
  text "Hole Type" at 3383.76,5065.5 h72
  text "Drill Layer Pair" at 4117.56,5065.5 h72
  text "Via/Pad" at 5617.11,5065.5 h72
  text "Pad Shape" at 6206.96,5065.5 h72
  text "Template" at 6952.76,5065.5 h72
  text "Description" at 7602.59,5065.5 h72
  text "Hole Tolerance (+)" at 8456.35,5065.5 h72
  text "Hole Tolerance (-)" at 9789.96,5065.5 h72
  text "1" at 1138.38,4915.5 h60
  text "90.00mil (2.286mm)" at 1738.22,4915.5 h60
  text "PTH" at 2877.88,4915.5 h60
  text "Round" at 3383.76,4915.5 h60
  text "Top Layer - Bottom Layer" at 4117.56,4915.5 h60
  text "Pad" at 5617.11,4915.5 h60
  text "Rounded" at 6206.96,4915.5 h60
  text "c102h229" at 6952.76,4915.5 h60
  text "2" at 1138.38,4765.5 h60
  text "125.00mil (3.175mm)" at 1738.22,4765.5 h60
  text "PTH" at 2877.88,4765.5 h60
  text "Round" at 3383.76,4765.5 h60
  text "Top Layer - Bottom Layer" at 4117.56,4765.5 h60
  text "Pad" at 5617.11,4765.5 h60
  text "Rounded" at 6206.96,4765.5 h60
  text "c102h318" at 6952.76,4765.5 h60
  text "4" at 1138.38,4615.5 h60
  text "61.00mil (1.549mm)" at 1738.22,4615.5 h60
  text "PTH" at 2877.88,4615.5 h60
  text "Round" at 3383.76,4615.5 h60
  text "Top Layer - Bottom Layer" at 4117.56,4615.5 h60
  text "Pad" at 5617.11,4615.5 h60
  text "Rounded" at 6206.96,4615.5 h60
  text "c318h155" at 6952.76,4615.5 h60
  text "5" at 1138.38,4465.5 h60
  text "150.00mil (3.810mm)" at 1738.22,4465.5 h60
  text "PTH" at 2877.88,4465.5 h60
  text "Round" at 3383.76,4465.5 h60
  text "Top Layer - Bottom Layer" at 4117.56,4465.5 h60
  text "Pad" at 5617.11,4465.5 h60
  text "Rounded" at 6206.96,4465.5 h60
  text "c381h381" at 6952.76,4465.5 h60
  text "88" at 1138.38,4315.5 h60
  text "50.00mil (1.270mm)" at 1738.22,4315.5 h60
  text "PTH" at 2877.88,4315.5 h60
  text "Round" at 3383.76,4315.5 h60
  text "Top Layer - Bottom Layer" at 4117.56,4315.5 h60
  text "Pad" at 5617.11,4315.5 h60
  text "Rounded" at 6206.96,4315.5 h60
  text "(Mixed)" at 6952.76,4315.5 h60
  text "252" at 1138.38,4165.5 h60
  text "34.00mil (0.864mm)" at 1738.22,4165.5 h60
  text "PTH" at 2877.88,4165.5 h60
  text "Round" at 3383.76,4165.5 h60
  text "Top Layer - Bottom Layer" at 4117.56,4165.5 h60
  text "Pad" at 5617.11,4165.5 h60
  text "Rounded" at 6206.96,4165.5 h60
  text "(Mixed)" at 6952.76,4165.5 h60
  text "352 Total" at 1138.38,4015.5 h60